# EAGLE board INA169_Breakout-Panel-v10 (EAGLE 6.5.0)
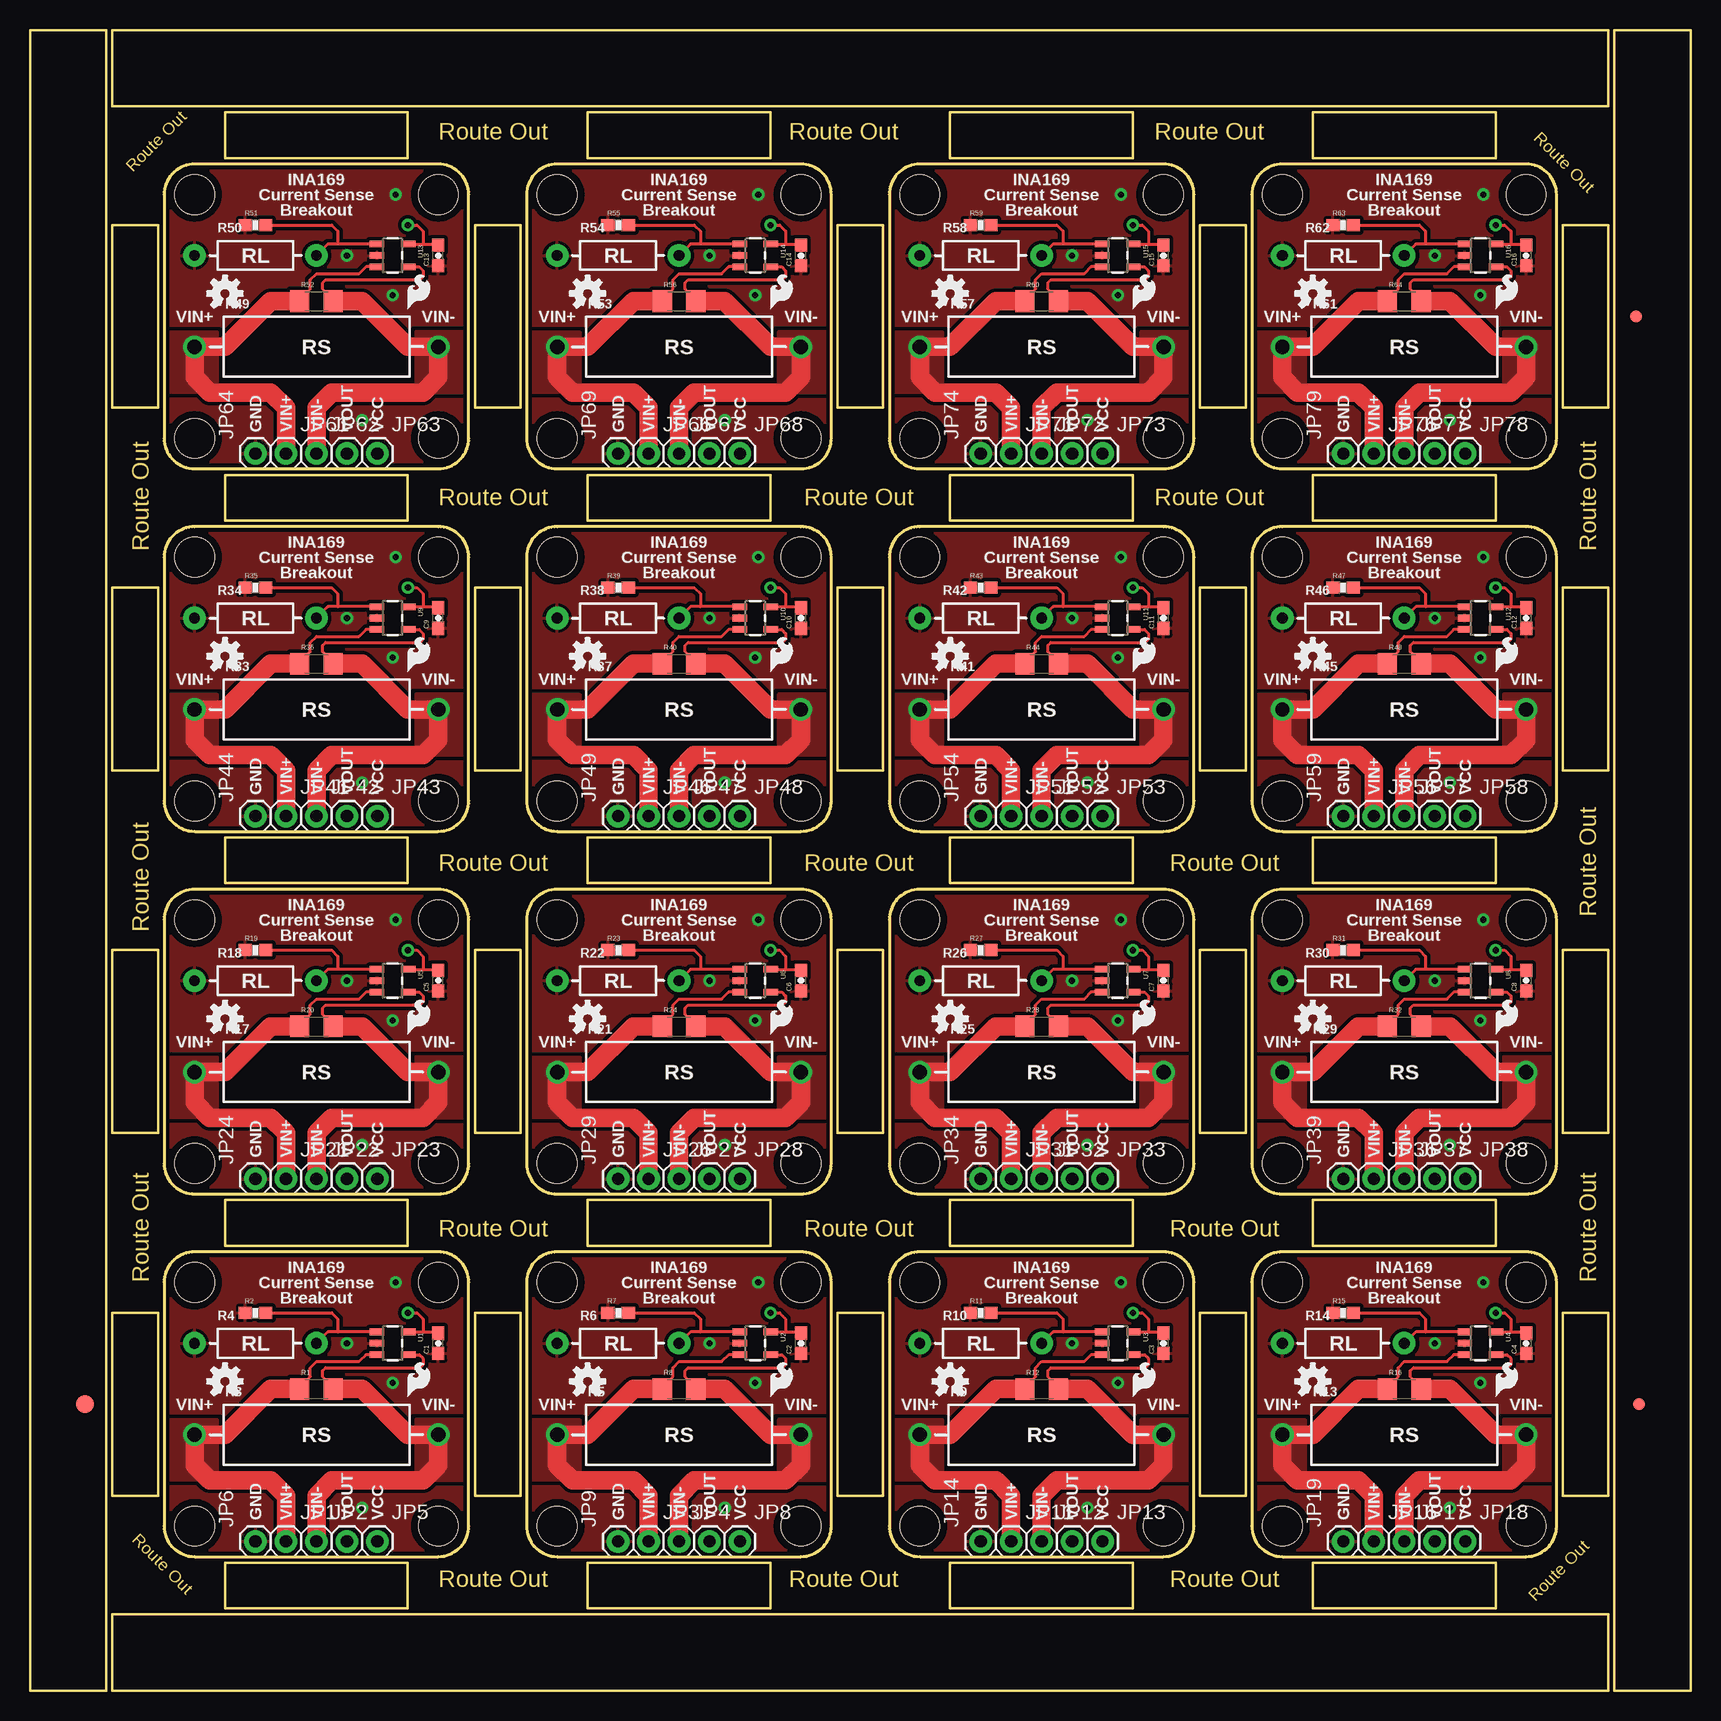
[diagram p0: board, top side]
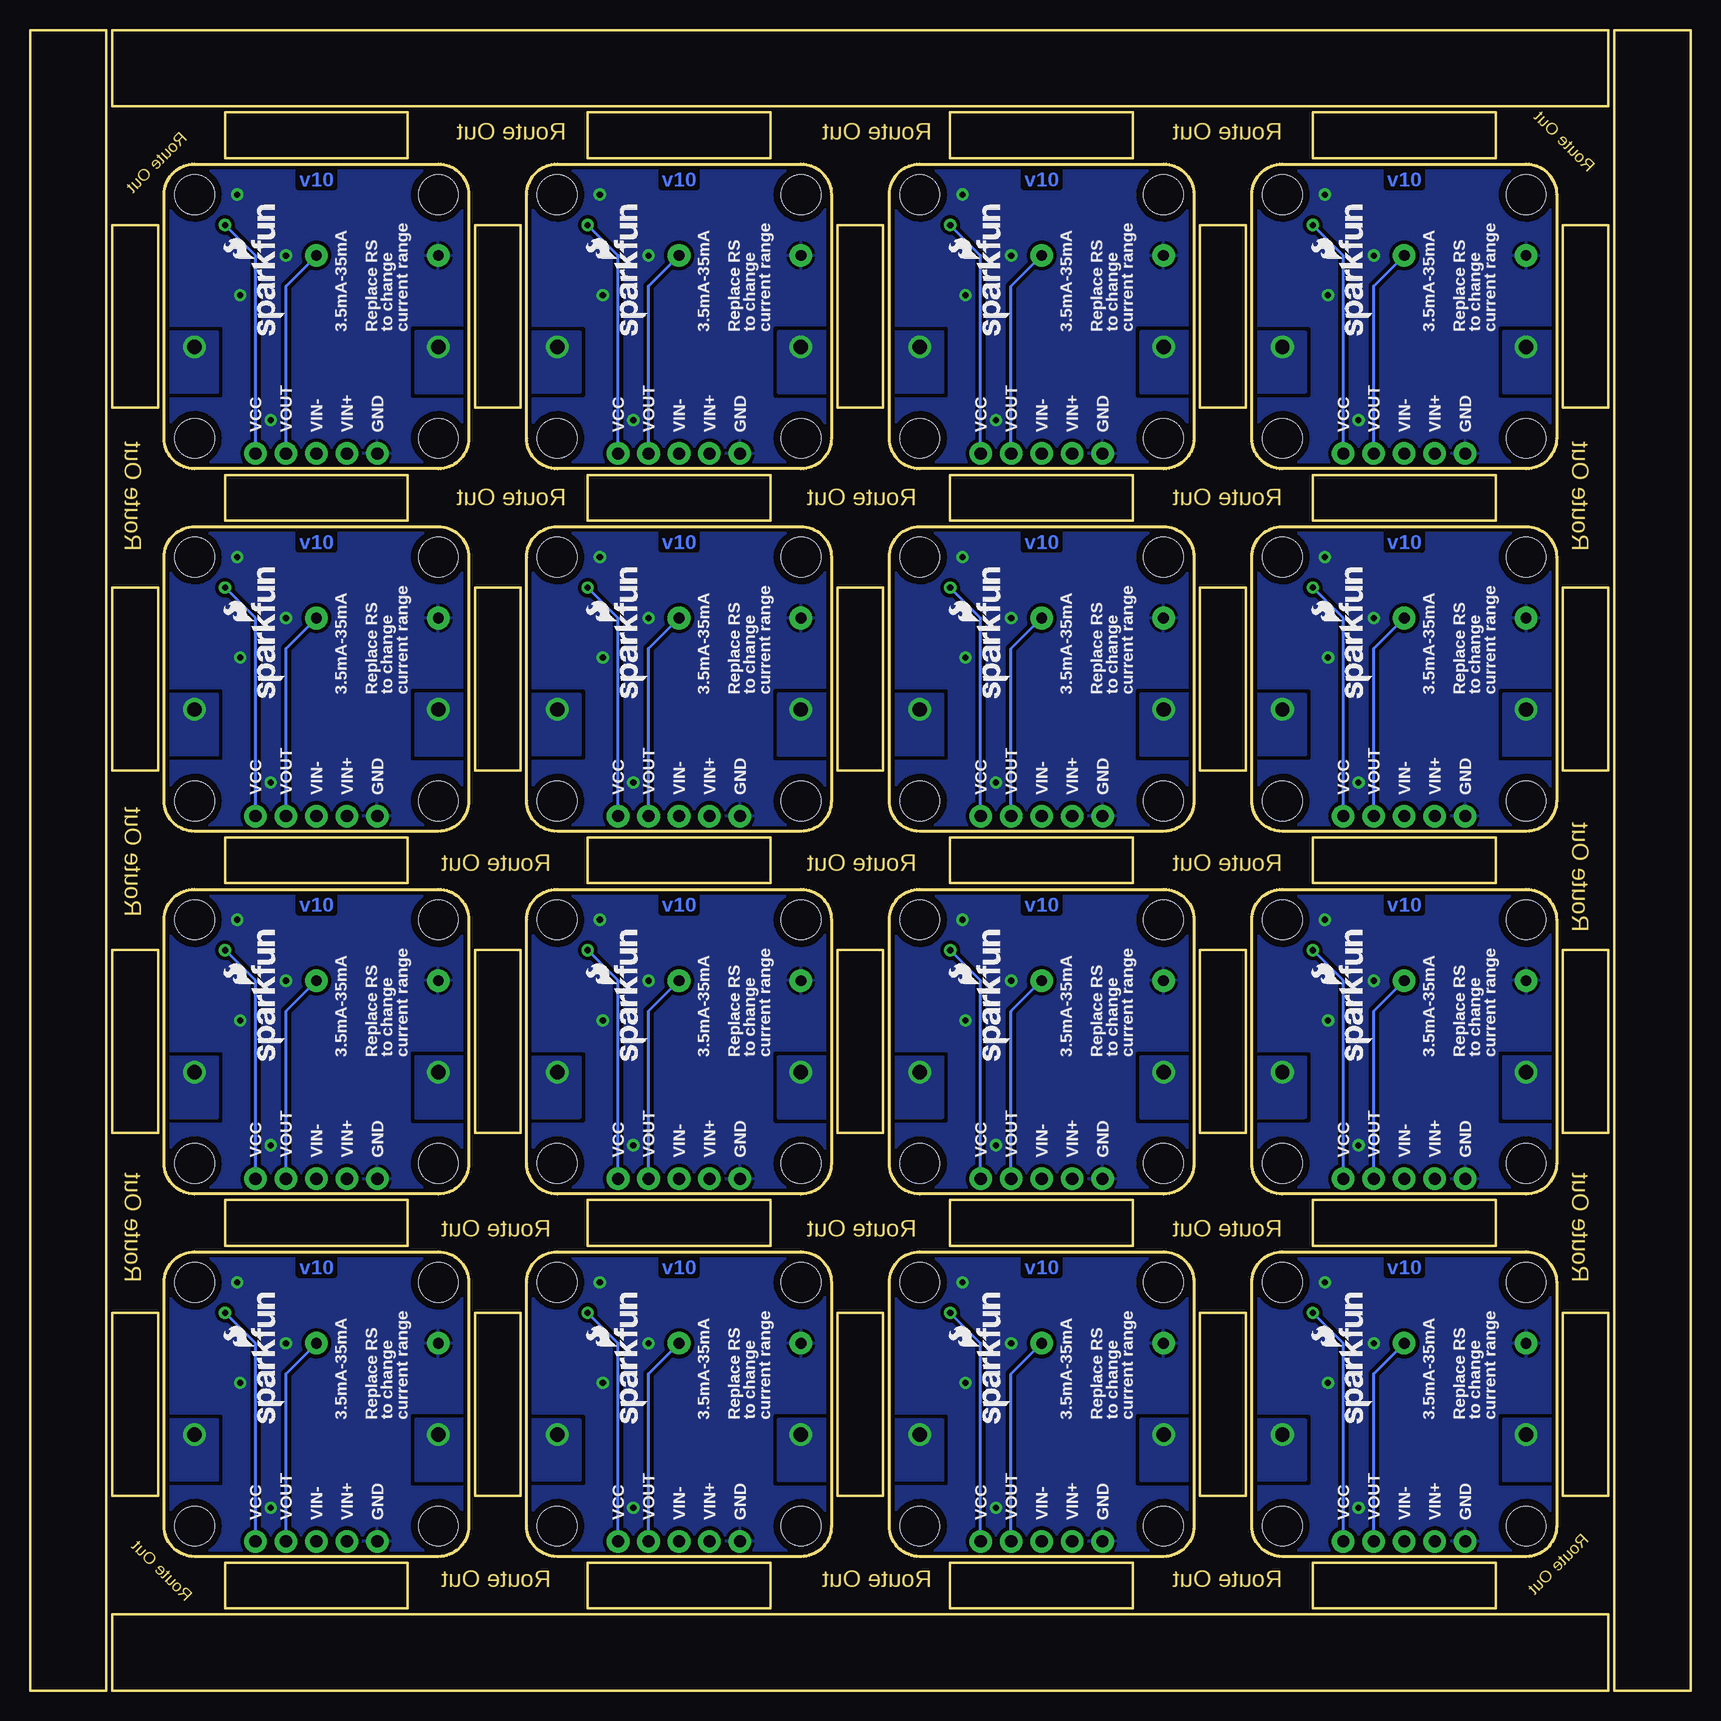
[diagram p1: board, bottom side, seen from below]

Size 138.43 x 138.43 mm. Coordinates in mm from the lower left corner, seen from the top.
Outline: 304 segments
Copper layers (1*16): Top 0.035mm / dielectric 1.5mm / Bottom 0.035mm
Design rules "default": minimum track width 7mil, minimum drill 15mil, track to track 8mil, track to pad 8mil, pad to pad 8mil, via to via 8mil, smd to smd 8mil, copper to edge 8mil, drill to drill 8mil, minimum pad ring 12mil, minimum via ring 10mil, stop-mask expansion 4mil, vias tented up to drill 20mil, thermal gap 10mil
tRestrict: area 29.7,27.7 to 30.7,30.2; area 30.5,28.4 to 33.3,29.5; area 59.9,27.7 to 61,30.2; area 60.7,28.4 to 63.5,29.5; area 90.2,27.7 to 91.2,30.2; area 90.9,28.4 to 93.7,29.5; area 120.4,27.7 to 121.4,30.2; area 121.2,28.4 to 124,29.5; area 29.7,57.9 to 30.7,60.5; area 30.5,58.7 to 33.3,59.7; area 59.9,57.9 to 61,60.5; area 60.7,58.7 to 63.5,59.7; 20 more areas

## Footprints (pad centres in the part's own frame; a part is rotated, then mirrored left to right if it is on the bottom)
0603-CAP = smd 1.1 x 1: 1 -0.85,0; 2 0.85,0
FIDUCIAL-1.5X3 = smd 1.5 x 1.5: 1 0,0
FIDUCIAL-1X2 = smd 1 x 1: 1 0,0
1X01 = drill 1.016 pad 1.88: 1 0,0
1206 = smd 1.6 x 1.8: 1 -1.4,0; 2 1.4,0
0603-RES = smd 1.1 x 1: 1 -0.85,0; 2 0.85,0
AXIAL-0.8 = drill 1.2 pad 1.88: P$1 -10.16,0; P$2 10.16,0
AXIAL-0.4 = drill 0.9 pad 1.88: P$1 -5.08,0; P$2 5.08,0
STAND-OFF = hole 3.302: 0,0
SOT23-5 = smd 0.55 x 1.2: 1 -0.95,-1.3; 2 0,-1.3; 3 0.95,-1.3; 4 0.95,1.3; 5 -0.95,1.3

## Placement (x,y rotation side)
C1  0.1uF  [0603-CAP]  34.04,28.96 90 top
C2  0.1uF  [0603-CAP]  64.26,28.96 90 top
C3  0.1uF  [0603-CAP]  94.49,28.96 90 top
C4  0.1uF  [0603-CAP]  124.71,28.96 90 top
C5  0.1uF  [0603-CAP]  34.04,59.18 90 top
C6  0.1uF  [0603-CAP]  64.26,59.18 90 top
C7  0.1uF  [0603-CAP]  94.49,59.18 90 top
C8  0.1uF  [0603-CAP]  124.71,59.18 90 top
C9  0.1uF  [0603-CAP]  34.04,89.41 90 top
C10  0.1uF  [0603-CAP]  64.26,89.41 90 top
C11  0.1uF  [0603-CAP]  94.49,89.41 90 top
C12  0.1uF  [0603-CAP]  124.71,89.41 90 top
C13  0.1uF  [0603-CAP]  34.04,119.63 90 top
C14  0.1uF  [0603-CAP]  64.26,119.63 90 top
C15  0.1uF  [0603-CAP]  94.49,119.63 90 top
C16  0.1uF  [0603-CAP]  124.71,119.63 90 top
E$1  [FIDUCIAL-1.5X3]  4.57,23.88 0 top
E$4  [FIDUCIAL-1X2]  133.86,114.55 180 top
E$5  [FIDUCIAL-1X2]  134.11,23.88 0 top
JP1  M01PTH  [1X01]  21.34,12.45 0 top
JP2  M01PTH  [1X01]  23.88,12.45 0 top
JP3  M01PTH  [1X01]  51.56,12.45 0 top
JP4  M01PTH  [1X01]  54.1,12.45 0 top
JP5  M01PTH  [1X01]  28.96,12.45 0 top
JP6  M01PTH  [1X01]  18.8,12.45 90 top
JP7  M01PTH  [1X01]  26.42,12.45 180 top
JP8  M01PTH  [1X01]  59.18,12.45 0 top
JP9  M01PTH  [1X01]  49.02,12.45 90 top
JP10  M01PTH  [1X01]  56.64,12.45 180 top
JP11  M01PTH  [1X01]  81.79,12.45 0 top
JP12  M01PTH  [1X01]  84.33,12.45 0 top
JP13  M01PTH  [1X01]  89.41,12.45 0 top
JP14  M01PTH  [1X01]  79.25,12.45 90 top
JP15  M01PTH  [1X01]  86.87,12.45 180 top
JP16  M01PTH  [1X01]  112.01,12.45 0 top
JP17  M01PTH  [1X01]  114.55,12.45 0 top
JP18  M01PTH  [1X01]  119.63,12.45 0 top
JP19  M01PTH  [1X01]  109.47,12.45 90 top
JP20  M01PTH  [1X01]  117.09,12.45 180 top
JP21  M01PTH  [1X01]  21.34,42.67 0 top
JP22  M01PTH  [1X01]  23.88,42.67 0 top
JP23  M01PTH  [1X01]  28.96,42.67 0 top
JP24  M01PTH  [1X01]  18.8,42.67 90 top
JP25  M01PTH  [1X01]  26.42,42.67 180 top
JP26  M01PTH  [1X01]  51.56,42.67 0 top
JP27  M01PTH  [1X01]  54.1,42.67 0 top
JP28  M01PTH  [1X01]  59.18,42.67 0 top
JP29  M01PTH  [1X01]  49.02,42.67 90 top
JP30  M01PTH  [1X01]  56.64,42.67 180 top
JP31  M01PTH  [1X01]  81.79,42.67 0 top
JP32  M01PTH  [1X01]  84.33,42.67 0 top
JP33  M01PTH  [1X01]  89.41,42.67 0 top
JP34  M01PTH  [1X01]  79.25,42.67 90 top
JP35  M01PTH  [1X01]  86.87,42.67 180 top
JP36  M01PTH  [1X01]  112.01,42.67 0 top
JP37  M01PTH  [1X01]  114.55,42.67 0 top
JP38  M01PTH  [1X01]  119.63,42.67 0 top
JP39  M01PTH  [1X01]  109.47,42.67 90 top
JP40  M01PTH  [1X01]  117.09,42.67 180 top
JP41  M01PTH  [1X01]  21.34,72.9 0 top
JP42  M01PTH  [1X01]  23.88,72.9 0 top
JP43  M01PTH  [1X01]  28.96,72.9 0 top
JP44  M01PTH  [1X01]  18.8,72.9 90 top
JP45  M01PTH  [1X01]  26.42,72.9 180 top
JP46  M01PTH  [1X01]  51.56,72.9 0 top
JP47  M01PTH  [1X01]  54.1,72.9 0 top
JP48  M01PTH  [1X01]  59.18,72.9 0 top
JP49  M01PTH  [1X01]  49.02,72.9 90 top
JP50  M01PTH  [1X01]  56.64,72.9 180 top
JP51  M01PTH  [1X01]  81.79,72.9 0 top
JP52  M01PTH  [1X01]  84.33,72.9 0 top
JP53  M01PTH  [1X01]  89.41,72.9 0 top
JP54  M01PTH  [1X01]  79.25,72.9 90 top
JP55  M01PTH  [1X01]  86.87,72.9 180 top
JP56  M01PTH  [1X01]  112.01,72.9 0 top
JP57  M01PTH  [1X01]  114.55,72.9 0 top
JP58  M01PTH  [1X01]  119.63,72.9 0 top
JP59  M01PTH  [1X01]  109.47,72.9 90 top
JP60  M01PTH  [1X01]  117.09,72.9 180 top
JP61  M01PTH  [1X01]  21.34,103.12 0 top
JP62  M01PTH  [1X01]  23.88,103.12 0 top
JP63  M01PTH  [1X01]  28.96,103.12 0 top
JP64  M01PTH  [1X01]  18.8,103.12 90 top
JP65  M01PTH  [1X01]  26.42,103.12 180 top
JP66  M01PTH  [1X01]  51.56,103.12 0 top
JP67  M01PTH  [1X01]  54.1,103.12 0 top
JP68  M01PTH  [1X01]  59.18,103.12 0 top
JP69  M01PTH  [1X01]  49.02,103.12 90 top
JP70  M01PTH  [1X01]  56.64,103.12 180 top
JP71  M01PTH  [1X01]  81.79,103.12 0 top
JP72  M01PTH  [1X01]  84.33,103.12 0 top
JP73  M01PTH  [1X01]  89.41,103.12 0 top
JP74  M01PTH  [1X01]  79.25,103.12 90 top
JP75  M01PTH  [1X01]  86.87,103.12 180 top
JP76  M01PTH  [1X01]  112.01,103.12 0 top
JP77  M01PTH  [1X01]  114.55,103.12 0 top
JP78  M01PTH  [1X01]  119.63,103.12 0 top
JP79  M01PTH  [1X01]  109.47,103.12 90 top
JP80  M01PTH  [1X01]  117.09,103.12 180 top
LOGO1  SFE_LOGO_NAME_FLAME.1_INCH  [SFE_LOGO_NAME_FLAME_.1]  26.42,21.84 90 bottom
LOGO2  OSHW-LOGOS  [OSHW-LOGO-S]  16.26,25.78 0 top
LOGO3  LOGO-SFESK  [SFE-LOGO-FLAME]  31.5,24.51 0 top
LOGO4  SFE_LOGO_NAME_FLAME.1_INCH  [SFE_LOGO_NAME_FLAME_.1]  56.64,21.84 90 bottom
LOGO5  OSHW-LOGOS  [OSHW-LOGO-S]  46.48,25.78 0 top
LOGO6  LOGO-SFESK  [SFE-LOGO-FLAME]  61.72,24.51 0 top
LOGO7  SFE_LOGO_NAME_FLAME.1_INCH  [SFE_LOGO_NAME_FLAME_.1]  86.87,21.84 90 bottom
LOGO8  OSHW-LOGOS  [OSHW-LOGO-S]  76.71,25.78 0 top
LOGO9  LOGO-SFESK  [SFE-LOGO-FLAME]  91.95,24.51 0 top
LOGO10  SFE_LOGO_NAME_FLAME.1_INCH  [SFE_LOGO_NAME_FLAME_.1]  117.09,21.84 90 bottom
LOGO11  OSHW-LOGOS  [OSHW-LOGO-S]  106.93,25.78 0 top
LOGO12  LOGO-SFESK  [SFE-LOGO-FLAME]  122.17,24.51 0 top
LOGO13  SFE_LOGO_NAME_FLAME.1_INCH  [SFE_LOGO_NAME_FLAME_.1]  26.42,52.07 90 bottom
LOGO14  OSHW-LOGOS  [OSHW-LOGO-S]  16.26,56.01 0 top
LOGO15  LOGO-SFESK  [SFE-LOGO-FLAME]  31.5,54.74 0 top
LOGO16  SFE_LOGO_NAME_FLAME.1_INCH  [SFE_LOGO_NAME_FLAME_.1]  56.64,52.07 90 bottom
LOGO17  OSHW-LOGOS  [OSHW-LOGO-S]  46.48,56.01 0 top
LOGO18  LOGO-SFESK  [SFE-LOGO-FLAME]  61.72,54.74 0 top
LOGO19  SFE_LOGO_NAME_FLAME.1_INCH  [SFE_LOGO_NAME_FLAME_.1]  86.87,52.07 90 bottom
LOGO20  OSHW-LOGOS  [OSHW-LOGO-S]  76.71,56.01 0 top
LOGO21  LOGO-SFESK  [SFE-LOGO-FLAME]  91.95,54.74 0 top
LOGO22  SFE_LOGO_NAME_FLAME.1_INCH  [SFE_LOGO_NAME_FLAME_.1]  117.09,52.07 90 bottom
LOGO23  OSHW-LOGOS  [OSHW-LOGO-S]  106.93,56.01 0 top
LOGO24  LOGO-SFESK  [SFE-LOGO-FLAME]  122.17,54.74 0 top
LOGO25  SFE_LOGO_NAME_FLAME.1_INCH  [SFE_LOGO_NAME_FLAME_.1]  26.42,82.3 90 bottom
LOGO26  OSHW-LOGOS  [OSHW-LOGO-S]  16.26,86.23 0 top
LOGO27  LOGO-SFESK  [SFE-LOGO-FLAME]  31.5,84.96 0 top
LOGO28  SFE_LOGO_NAME_FLAME.1_INCH  [SFE_LOGO_NAME_FLAME_.1]  56.64,82.3 90 bottom
LOGO29  OSHW-LOGOS  [OSHW-LOGO-S]  46.48,86.23 0 top
LOGO30  LOGO-SFESK  [SFE-LOGO-FLAME]  61.72,84.96 0 top
LOGO31  SFE_LOGO_NAME_FLAME.1_INCH  [SFE_LOGO_NAME_FLAME_.1]  86.87,82.3 90 bottom
LOGO32  OSHW-LOGOS  [OSHW-LOGO-S]  76.71,86.23 0 top
LOGO33  LOGO-SFESK  [SFE-LOGO-FLAME]  91.95,84.96 0 top
LOGO34  SFE_LOGO_NAME_FLAME.1_INCH  [SFE_LOGO_NAME_FLAME_.1]  117.09,82.3 90 bottom
LOGO35  OSHW-LOGOS  [OSHW-LOGO-S]  106.93,86.23 0 top
LOGO36  LOGO-SFESK  [SFE-LOGO-FLAME]  122.17,84.96 0 top
LOGO37  SFE_LOGO_NAME_FLAME.1_INCH  [SFE_LOGO_NAME_FLAME_.1]  26.42,112.52 90 bottom
LOGO38  OSHW-LOGOS  [OSHW-LOGO-S]  16.26,116.46 0 top
LOGO39  LOGO-SFESK  [SFE-LOGO-FLAME]  31.5,115.19 0 top
LOGO40  SFE_LOGO_NAME_FLAME.1_INCH  [SFE_LOGO_NAME_FLAME_.1]  56.64,112.52 90 bottom
LOGO41  OSHW-LOGOS  [OSHW-LOGO-S]  46.48,116.46 0 top
LOGO42  LOGO-SFESK  [SFE-LOGO-FLAME]  61.72,115.19 0 top
LOGO43  SFE_LOGO_NAME_FLAME.1_INCH  [SFE_LOGO_NAME_FLAME_.1]  86.87,112.52 90 bottom
LOGO44  OSHW-LOGOS  [OSHW-LOGO-S]  76.71,116.46 0 top
LOGO45  LOGO-SFESK  [SFE-LOGO-FLAME]  91.95,115.19 0 top
LOGO46  SFE_LOGO_NAME_FLAME.1_INCH  [SFE_LOGO_NAME_FLAME_.1]  117.09,112.52 90 bottom
LOGO47  OSHW-LOGOS  [OSHW-LOGO-S]  106.93,116.46 0 top
LOGO48  LOGO-SFESK  [SFE-LOGO-FLAME]  122.17,115.19 0 top
R1  10  [1206]  23.88,25.15 0 top
R2  10k  [0603-RES]  18.8,31.5 0 top
R3  [AXIAL-0.8]  23.88,21.34 0 top
R4  [AXIAL-0.4]  18.8,28.96 0 top
R5  [AXIAL-0.8]  54.1,21.34 0 top
R6  [AXIAL-0.4]  49.02,28.96 0 top
R7  10k  [0603-RES]  49.02,31.5 0 top
R8  10  [1206]  54.1,25.15 0 top
R9  [AXIAL-0.8]  84.33,21.34 0 top
R10  [AXIAL-0.4]  79.25,28.96 0 top
R11  10k  [0603-RES]  79.25,31.5 0 top
R12  10  [1206]  84.33,25.15 0 top
R13  [AXIAL-0.8]  114.55,21.34 0 top
R14  [AXIAL-0.4]  109.47,28.96 0 top
R15  10k  [0603-RES]  109.47,31.5 0 top
R16  10  [1206]  114.55,25.15 0 top
R17  [AXIAL-0.8]  23.88,51.56 0 top
R18  [AXIAL-0.4]  18.8,59.18 0 top
R19  10k  [0603-RES]  18.8,61.72 0 top
R20  10  [1206]  23.88,55.37 0 top
R21  [AXIAL-0.8]  54.1,51.56 0 top
R22  [AXIAL-0.4]  49.02,59.18 0 top
R23  10k  [0603-RES]  49.02,61.72 0 top
R24  10  [1206]  54.1,55.37 0 top
R25  [AXIAL-0.8]  84.33,51.56 0 top
R26  [AXIAL-0.4]  79.25,59.18 0 top
R27  10k  [0603-RES]  79.25,61.72 0 top
R28  10  [1206]  84.33,55.37 0 top
R29  [AXIAL-0.8]  114.55,51.56 0 top
R30  [AXIAL-0.4]  109.47,59.18 0 top
R31  10k  [0603-RES]  109.47,61.72 0 top
R32  10  [1206]  114.55,55.37 0 top
R33  [AXIAL-0.8]  23.88,81.79 0 top
R34  [AXIAL-0.4]  18.8,89.41 0 top
R35  10k  [0603-RES]  18.8,91.95 0 top
R36  10  [1206]  23.88,85.6 0 top
R37  [AXIAL-0.8]  54.1,81.79 0 top
R38  [AXIAL-0.4]  49.02,89.41 0 top
R39  10k  [0603-RES]  49.02,91.95 0 top
R40  10  [1206]  54.1,85.6 0 top
R41  [AXIAL-0.8]  84.33,81.79 0 top
R42  [AXIAL-0.4]  79.25,89.41 0 top
R43  10k  [0603-RES]  79.25,91.95 0 top
R44  10  [1206]  84.33,85.6 0 top
R45  [AXIAL-0.8]  114.55,81.79 0 top
R46  [AXIAL-0.4]  109.47,89.41 0 top
R47  10k  [0603-RES]  109.47,91.95 0 top
R48  10  [1206]  114.55,85.6 0 top
R49  [AXIAL-0.8]  23.88,112.01 0 top
R50  [AXIAL-0.4]  18.8,119.63 0 top
R51  10k  [0603-RES]  18.8,122.17 0 top
R52  10  [1206]  23.88,115.82 0 top
R53  [AXIAL-0.8]  54.1,112.01 0 top
R54  [AXIAL-0.4]  49.02,119.63 0 top
R55  10k  [0603-RES]  49.02,122.17 0 top
R56  10  [1206]  54.1,115.82 0 top
R57  [AXIAL-0.8]  84.33,112.01 0 top
R58  [AXIAL-0.4]  79.25,119.63 0 top
R59  10k  [0603-RES]  79.25,122.17 0 top
R60  10  [1206]  84.33,115.82 0 top
R61  [AXIAL-0.8]  114.55,112.01 0 top
R62  [AXIAL-0.4]  109.47,119.63 0 top
R63  10k  [0603-RES]  109.47,122.17 0 top
R64  10  [1206]  114.55,115.82 0 top
STANDOFF1  STAND-OFF  [STAND-OFF]  13.72,34.04 0 top
STANDOFF2  STAND-OFF  [STAND-OFF]  34.04,34.04 0 top
STANDOFF3  STAND-OFF  [STAND-OFF]  34.04,13.72 0 top
STANDOFF4  STAND-OFF  [STAND-OFF]  13.72,13.72 0 top
STANDOFF5  STAND-OFF  [STAND-OFF]  43.94,34.04 0 top
STANDOFF6  STAND-OFF  [STAND-OFF]  64.26,34.04 0 top
STANDOFF7  STAND-OFF  [STAND-OFF]  64.26,13.72 0 top
STANDOFF8  STAND-OFF  [STAND-OFF]  43.94,13.72 0 top
STANDOFF9  STAND-OFF  [STAND-OFF]  74.17,34.04 0 top
STANDOFF10  STAND-OFF  [STAND-OFF]  94.49,34.04 0 top
STANDOFF11  STAND-OFF  [STAND-OFF]  94.49,13.72 0 top
STANDOFF12  STAND-OFF  [STAND-OFF]  74.17,13.72 0 top
STANDOFF13  STAND-OFF  [STAND-OFF]  104.39,34.04 0 top
STANDOFF14  STAND-OFF  [STAND-OFF]  124.71,34.04 0 top
STANDOFF15  STAND-OFF  [STAND-OFF]  124.71,13.72 0 top
STANDOFF16  STAND-OFF  [STAND-OFF]  104.39,13.72 0 top
STANDOFF17  STAND-OFF  [STAND-OFF]  13.72,64.26 0 top
STANDOFF18  STAND-OFF  [STAND-OFF]  34.04,64.26 0 top
STANDOFF19  STAND-OFF  [STAND-OFF]  34.04,43.94 0 top
STANDOFF20  STAND-OFF  [STAND-OFF]  13.72,43.94 0 top
STANDOFF21  STAND-OFF  [STAND-OFF]  43.94,64.26 0 top
STANDOFF22  STAND-OFF  [STAND-OFF]  64.26,64.26 0 top
STANDOFF23  STAND-OFF  [STAND-OFF]  64.26,43.94 0 top
STANDOFF24  STAND-OFF  [STAND-OFF]  43.94,43.94 0 top
STANDOFF25  STAND-OFF  [STAND-OFF]  74.17,64.26 0 top
STANDOFF26  STAND-OFF  [STAND-OFF]  94.49,64.26 0 top
STANDOFF27  STAND-OFF  [STAND-OFF]  94.49,43.94 0 top
STANDOFF28  STAND-OFF  [STAND-OFF]  74.17,43.94 0 top
STANDOFF29  STAND-OFF  [STAND-OFF]  104.39,64.26 0 top
STANDOFF30  STAND-OFF  [STAND-OFF]  124.71,64.26 0 top
STANDOFF31  STAND-OFF  [STAND-OFF]  124.71,43.94 0 top
STANDOFF32  STAND-OFF  [STAND-OFF]  104.39,43.94 0 top
STANDOFF33  STAND-OFF  [STAND-OFF]  13.72,94.49 0 top
STANDOFF34  STAND-OFF  [STAND-OFF]  34.04,94.49 0 top
STANDOFF35  STAND-OFF  [STAND-OFF]  34.04,74.17 0 top
STANDOFF36  STAND-OFF  [STAND-OFF]  13.72,74.17 0 top
STANDOFF37  STAND-OFF  [STAND-OFF]  43.94,94.49 0 top
STANDOFF38  STAND-OFF  [STAND-OFF]  64.26,94.49 0 top
STANDOFF39  STAND-OFF  [STAND-OFF]  64.26,74.17 0 top
STANDOFF40  STAND-OFF  [STAND-OFF]  43.94,74.17 0 top
STANDOFF41  STAND-OFF  [STAND-OFF]  74.17,94.49 0 top
STANDOFF42  STAND-OFF  [STAND-OFF]  94.49,94.49 0 top
STANDOFF43  STAND-OFF  [STAND-OFF]  94.49,74.17 0 top
STANDOFF44  STAND-OFF  [STAND-OFF]  74.17,74.17 0 top
STANDOFF45  STAND-OFF  [STAND-OFF]  104.39,94.49 0 top
STANDOFF46  STAND-OFF  [STAND-OFF]  124.71,94.49 0 top
STANDOFF47  STAND-OFF  [STAND-OFF]  124.71,74.17 0 top
STANDOFF48  STAND-OFF  [STAND-OFF]  104.39,74.17 0 top
STANDOFF49  STAND-OFF  [STAND-OFF]  13.72,124.71 0 top
STANDOFF50  STAND-OFF  [STAND-OFF]  34.04,124.71 0 top
STANDOFF51  STAND-OFF  [STAND-OFF]  34.04,104.39 0 top
STANDOFF52  STAND-OFF  [STAND-OFF]  13.72,104.39 0 top
STANDOFF53  STAND-OFF  [STAND-OFF]  43.94,124.71 0 top
STANDOFF54  STAND-OFF  [STAND-OFF]  64.26,124.71 0 top
STANDOFF55  STAND-OFF  [STAND-OFF]  64.26,104.39 0 top
STANDOFF56  STAND-OFF  [STAND-OFF]  43.94,104.39 0 top
STANDOFF57  STAND-OFF  [STAND-OFF]  74.17,124.71 0 top
STANDOFF58  STAND-OFF  [STAND-OFF]  94.49,124.71 0 top
STANDOFF59  STAND-OFF  [STAND-OFF]  94.49,104.39 0 top
STANDOFF60  STAND-OFF  [STAND-OFF]  74.17,104.39 0 top
STANDOFF61  STAND-OFF  [STAND-OFF]  104.39,124.71 0 top
STANDOFF62  STAND-OFF  [STAND-OFF]  124.71,124.71 0 top
STANDOFF63  STAND-OFF  [STAND-OFF]  124.71,104.39 0 top
STANDOFF64  STAND-OFF  [STAND-OFF]  104.39,104.39 0 top
U1  INA169  [SOT23-5]  30.23,28.96 270 top
U2  INA169  [SOT23-5]  60.45,28.96 270 top
U3  INA169  [SOT23-5]  90.68,28.96 270 top
U4  INA169  [SOT23-5]  120.9,28.96 270 top
U5  INA169  [SOT23-5]  30.23,59.18 270 top
U6  INA169  [SOT23-5]  60.45,59.18 270 top
U7  INA169  [SOT23-5]  90.68,59.18 270 top
U8  INA169  [SOT23-5]  120.9,59.18 270 top
U9  INA169  [SOT23-5]  30.23,89.41 270 top
U10  INA169  [SOT23-5]  60.45,89.41 270 top
U11  INA169  [SOT23-5]  90.68,89.41 270 top
U12  INA169  [SOT23-5]  120.9,89.41 270 top
U13  INA169  [SOT23-5]  30.23,119.63 270 top
U14  INA169  [SOT23-5]  60.45,119.63 270 top
U15  INA169  [SOT23-5]  90.68,119.63 270 top
U16  INA169  [SOT23-5]  120.9,119.63 270 top

## Library data of the parts
C1-C16 = SparkFun-Passives
E$1 E$4 E$5 LOGO1-LOGO48 = SparkFun-Aesthetics
JP1-JP80 = SparkFun-Connectors
R1 R8 R12 R16 R20 R24 R28 R32 R36 R40 R44 R48 R52 R56 R60 R64 = SparkFun-Resistors; SIZE: 1206; TOL: 1%
R2 R7 R11 R15 R19 R23 R27 R31 R35 R39 R43 R47 R51 R55 R59 R63 = SparkFun-Resistors; TOL: 1%
R3-R6 R9 R10 R13 R14 R17 R18 R21 R22 R25 R26 R29 R30 R33 R34 R37 R38 R41 R42 R45 R46 R49 R50 R53 R54 R57 R58 R61 R62 = SparkFun-Resistors; PLACE: DNP
STANDOFF1-STANDOFF64 = SparkFun-Electromechanical
U1-U16 = SparkFun-AnalogIC

## Nets
GND: C1.1 JP6.1 R2.1 R4.P$1 U1.2
GND1: C2.1 JP9.1 R6.P$1 R7.1 U2.2
GND2: C3.1 JP14.1 R10.P$1 R11.1 U3.2
GND3: C4.1 JP19.1 R14.P$1 R15.1 U4.2
GND4: C5.1 JP24.1 R18.P$1 R19.1 U5.2
GND5: C6.1 JP29.1 R22.P$1 R23.1 U6.2
GND6: C7.1 JP34.1 R26.P$1 R27.1 U7.2
GND7: C8.1 JP39.1 R30.P$1 R31.1 U8.2
GND8: C9.1 JP44.1 R34.P$1 R35.1 U9.2
GND9: C10.1 JP49.1 R38.P$1 R39.1 U10.2
GND10: C11.1 JP54.1 R42.P$1 R43.1 U11.2
GND11: C12.1 JP59.1 R46.P$1 R47.1 U12.2
GND12: C13.1 JP64.1 R50.P$1 R51.1 U13.2
GND13: C14.1 JP69.1 R54.P$1 R55.1 U14.2
GND14: C15.1 JP74.1 R58.P$1 R59.1 U15.2
GND15: C16.1 JP79.1 R62.P$1 R63.1 U16.2
VCC: C1.2 JP5.1 U1.5
VCC1: C2.2 JP8.1 U2.5
VCC2: C3.2 JP13.1 U3.5
VCC3: C4.2 JP18.1 U4.5
VCC4: C5.2 JP23.1 U5.5
VCC5: C6.2 JP28.1 U6.5
VCC6: C7.2 JP33.1 U7.5
VCC7: C8.2 JP38.1 U8.5
VCC8: C9.2 JP43.1 U9.5
VCC9: C10.2 JP48.1 U10.5
VCC10: C11.2 JP53.1 U11.5
VCC11: C12.2 JP58.1 U12.5
VCC12: C13.2 JP63.1 U13.5
VCC13: C14.2 JP68.1 U14.5
VCC14: C15.2 JP73.1 U15.5
VCC15: C16.2 JP78.1 U16.5
VIN+: JP1.1 R1.1 R3.P$1 U1.3
VIN+1: JP3.1 R5.P$1 R8.1 U2.3
VIN+2: JP11.1 R9.P$1 R12.1 U3.3
VIN+3: JP16.1 R13.P$1 R16.1 U4.3
VIN+4: JP21.1 R17.P$1 R20.1 U5.3
VIN+5: JP26.1 R21.P$1 R24.1 U6.3
VIN+6: JP31.1 R25.P$1 R28.1 U7.3
VIN+7: JP36.1 R29.P$1 R32.1 U8.3
VIN+8: JP41.1 R33.P$1 R36.1 U9.3
VIN+9: JP46.1 R37.P$1 R40.1 U10.3
VIN+10: JP51.1 R41.P$1 R44.1 U11.3
VIN+11: JP56.1 R45.P$1 R48.1 U12.3
VIN+12: JP61.1 R49.P$1 R52.1 U13.3
VIN+13: JP66.1 R53.P$1 R56.1 U14.3
VIN+14: JP71.1 R57.P$1 R60.1 U15.3
VIN+15: JP76.1 R61.P$1 R64.1 U16.3
VIN-: JP2.1 R1.2 R3.P$2 U1.4
VIN-1: JP4.1 R5.P$2 R8.2 U2.4
VIN-2: JP12.1 R9.P$2 R12.2 U3.4
VIN-3: JP17.1 R13.P$2 R16.2 U4.4
VIN-4: JP22.1 R17.P$2 R20.2 U5.4
VIN-5: JP27.1 R21.P$2 R24.2 U6.4
VIN-6: JP32.1 R25.P$2 R28.2 U7.4
VIN-7: JP37.1 R29.P$2 R32.2 U8.4
VIN-8: JP42.1 R33.P$2 R36.2 U9.4
VIN-9: JP47.1 R37.P$2 R40.2 U10.4
VIN-10: JP52.1 R41.P$2 R44.2 U11.4
VIN-11: JP57.1 R45.P$2 R48.2 U12.4
VIN-12: JP62.1 R49.P$2 R52.2 U13.4
VIN-13: JP67.1 R53.P$2 R56.2 U14.4
VIN-14: JP72.1 R57.P$2 R60.2 U15.4
VIN-15: JP77.1 R61.P$2 R64.2 U16.4
VOUT: JP7.1 R2.2 R4.P$2 U1.1
VOUT1: JP10.1 R6.P$2 R7.2 U2.1
VOUT2: JP15.1 R10.P$2 R11.2 U3.1
VOUT3: JP20.1 R14.P$2 R15.2 U4.1
VOUT4: JP25.1 R18.P$2 R19.2 U5.1
VOUT5: JP30.1 R22.P$2 R23.2 U6.1
VOUT6: JP35.1 R26.P$2 R27.2 U7.1
VOUT7: JP40.1 R30.P$2 R31.2 U8.1
VOUT8: JP45.1 R34.P$2 R35.2 U9.1
VOUT9: JP50.1 R38.P$2 R39.2 U10.1
VOUT10: JP55.1 R42.P$2 R43.2 U11.1
VOUT11: JP60.1 R46.P$2 R47.2 U12.1
VOUT12: JP65.1 R50.P$2 R51.2 U13.1
VOUT13: JP70.1 R54.P$2 R55.2 U14.1
VOUT14: JP75.1 R58.P$2 R59.2 U15.1
VOUT15: JP80.1 R62.P$2 R63.2 U16.1

## Tracks (layer width: path | path; a pad name or v marks a point on that pad's centre or on a via)
GND  (via drill 0.51)
  other vias: 26.42,28.96 30.48,34.04 27.69,15.24 30.23,25.65
  pour Top (isolate 0.305, rank 6): 11.18,36.58 11.18,11.18 36.58,11.18 36.58,36.58
  pour Bottom (isolate 0.305, rank 6): 11.18,36.58 11.18,11.18 36.58,11.18 36.58,36.58
GND1  (via drill 0.51)
  other vias: 56.64,28.96 60.71,34.04 57.91,15.24 60.45,25.65
  pour Top (isolate 0.305, rank 6): 41.4,36.58 41.4,11.18 66.8,11.18 66.8,36.58
  pour Bottom (isolate 0.305, rank 6): 41.4,36.58 41.4,11.18 66.8,11.18 66.8,36.58
GND2  (via drill 0.51)
  other vias: 86.87,28.96 90.93,34.04 88.14,15.24 90.68,25.65
  pour Top (isolate 0.305, rank 6): 71.63,36.58 71.63,11.18 97.03,11.18 97.03,36.58
  pour Bottom (isolate 0.305, rank 6): 71.63,36.58 71.63,11.18 97.03,11.18 97.03,36.58
GND3  (via drill 0.51)
  other vias: 117.09,28.96 121.16,34.04 118.36,15.24 120.9,25.65
  pour Top (isolate 0.305, rank 6): 101.85,36.58 101.85,11.18 127.25,11.18 127.25,36.58
  pour Bottom (isolate 0.305, rank 6): 101.85,36.58 101.85,11.18 127.25,11.18 127.25,36.58
GND4  (via drill 0.51)
  other vias: 26.42,59.18 30.48,64.26 27.69,45.47 30.23,55.88
  pour Top (isolate 0.305, rank 6): 11.18,66.8 11.18,41.4 36.58,41.4 36.58,66.8
  pour Bottom (isolate 0.305, rank 6): 11.18,66.8 11.18,41.4 36.58,41.4 36.58,66.8
GND5  (via drill 0.51)
  other vias: 56.64,59.18 60.71,64.26 57.91,45.47 60.45,55.88
  pour Top (isolate 0.305, rank 6): 41.4,66.8 41.4,41.4 66.8,41.4 66.8,66.8
  pour Bottom (isolate 0.305, rank 6): 41.4,66.8 41.4,41.4 66.8,41.4 66.8,66.8
GND6  (via drill 0.51)
  other vias: 86.87,59.18 90.93,64.26 88.14,45.47 90.68,55.88
  pour Top (isolate 0.305, rank 6): 71.63,66.8 71.63,41.4 97.03,41.4 97.03,66.8
  pour Bottom (isolate 0.305, rank 6): 71.63,66.8 71.63,41.4 97.03,41.4 97.03,66.8
GND7  (via drill 0.51)
  other vias: 117.09,59.18 121.16,64.26 118.36,45.47 120.9,55.88
  pour Top (isolate 0.305, rank 6): 101.85,66.8 101.85,41.4 127.25,41.4 127.25,66.8
  pour Bottom (isolate 0.305, rank 6): 101.85,66.8 101.85,41.4 127.25,41.4 127.25,66.8
GND8  (via drill 0.51)
  other vias: 26.42,89.41 30.48,94.49 27.69,75.69 30.23,86.11
  pour Top (isolate 0.305, rank 6): 11.18,97.03 11.18,71.63 36.58,71.63 36.58,97.03
  pour Bottom (isolate 0.305, rank 6): 11.18,97.03 11.18,71.63 36.58,71.63 36.58,97.03
GND9  (via drill 0.51)
  other vias: 56.64,89.41 60.71,94.49 57.91,75.69 60.45,86.11
  pour Top (isolate 0.305, rank 6): 41.4,97.03 41.4,71.63 66.8,71.63 66.8,97.03
  pour Bottom (isolate 0.305, rank 6): 41.4,97.03 41.4,71.63 66.8,71.63 66.8,97.03
GND10  (via drill 0.51)
  other vias: 86.87,89.41 90.93,94.49 88.14,75.69 90.68,86.11
  pour Top (isolate 0.305, rank 6): 71.63,97.03 71.63,71.63 97.03,71.63 97.03,97.03
  pour Bottom (isolate 0.305, rank 6): 71.63,97.03 71.63,71.63 97.03,71.63 97.03,97.03
GND11  (via drill 0.51)
  other vias: 117.09,89.41 121.16,94.49 118.36,75.69 120.9,86.11
  pour Top (isolate 0.305, rank 6): 101.85,97.03 101.85,71.63 127.25,71.63 127.25,97.03
  pour Bottom (isolate 0.305, rank 6): 101.85,97.03 101.85,71.63 127.25,71.63 127.25,97.03
GND12  (via drill 0.51)
  other vias: 26.42,119.63 30.48,124.71 27.69,105.92 30.23,116.33
  pour Top (isolate 0.305, rank 6): 11.18,127.25 11.18,101.85 36.58,101.85 36.58,127.25
  pour Bottom (isolate 0.305, rank 6): 11.18,127.25 11.18,101.85 36.58,101.85 36.58,127.25
GND13  (via drill 0.51)
  other vias: 56.64,119.63 60.71,124.71 57.91,105.92 60.45,116.33
  pour Top (isolate 0.305, rank 6): 41.4,127.25 41.4,101.85 66.8,101.85 66.8,127.25
  pour Bottom (isolate 0.305, rank 6): 41.4,127.25 41.4,101.85 66.8,101.85 66.8,127.25
GND14  (via drill 0.51)
  other vias: 86.87,119.63 90.93,124.71 88.14,105.92 90.68,116.33
  pour Top (isolate 0.305, rank 6): 71.63,127.25 71.63,101.85 97.03,101.85 97.03,127.25
  pour Bottom (isolate 0.305, rank 6): 71.63,127.25 71.63,101.85 97.03,101.85 97.03,127.25
GND15  (via drill 0.51)
  other vias: 117.09,119.63 121.16,124.71 118.36,105.92 120.9,116.33
  pour Top (isolate 0.305, rank 6): 101.85,127.25 101.85,101.85 127.25,101.85 127.25,127.25
  pour Bottom (isolate 0.305, rank 6): 101.85,127.25 101.85,101.85 127.25,101.85 127.25,127.25
VCC  (via drill 0.51)
  Top 0.254: U1.5 32.77,29.91 | 32.77,29.91 33.94,29.91 C1.2 | v31.5,31.5 32.26,31.5 32.77,30.99 32.77,29.91
  Bottom 0.254: JP5.1 28.96,28.96 v31.5,31.5
VCC1  (via drill 0.51)
  Top 0.254: U2.5 62.99,29.91 | 62.99,29.91 64.16,29.91 C2.2 | v61.72,31.5 62.48,31.5 62.99,30.99 62.99,29.91
  Bottom 0.254: JP8.1 59.18,28.96 v61.72,31.5
VCC2  (via drill 0.51)
  Top 0.254: U3.5 93.22,29.91 | 93.22,29.91 94.39,29.91 C3.2 | v91.95,31.5 92.71,31.5 93.22,30.99 93.22,29.91
  Bottom 0.254: JP13.1 89.41,28.96 v91.95,31.5
VCC3  (via drill 0.51)
  Top 0.254: U4.5 123.44,29.91 | 123.44,29.91 124.61,29.91 C4.2 | v122.17,31.5 122.94,31.5 123.44,30.99 123.44,29.91
  Bottom 0.254: JP18.1 119.63,28.96 v122.17,31.5
VCC4  (via drill 0.51)
  Top 0.254: U5.5 32.77,60.13 | 32.77,60.13 33.94,60.13 C5.2 | v31.5,61.72 32.26,61.72 32.77,61.21 32.77,60.13
  Bottom 0.254: JP23.1 28.96,59.18 v31.5,61.72
VCC5  (via drill 0.51)
  Top 0.254: U6.5 62.99,60.13 | 62.99,60.13 64.16,60.13 C6.2 | v61.72,61.72 62.48,61.72 62.99,61.21 62.99,60.13
  Bottom 0.254: JP28.1 59.18,59.18 v61.72,61.72
VCC6  (via drill 0.51)
  Top 0.254: U7.5 93.22,60.13 | 93.22,60.13 94.39,60.13 C7.2 | v91.95,61.72 92.71,61.72 93.22,61.21 93.22,60.13
  Bottom 0.254: JP33.1 89.41,59.18 v91.95,61.72
VCC7  (via drill 0.51)
  Top 0.254: U8.5 123.44,60.13 | 123.44,60.13 124.61,60.13 C8.2 | v122.17,61.72 122.94,61.72 123.44,61.21 123.44,60.13
  Bottom 0.254: JP38.1 119.63,59.18 v122.17,61.72
VCC8  (via drill 0.51)
  Top 0.254: U9.5 32.77,90.36 | 32.77,90.36 33.94,90.36 C9.2 | v31.5,91.95 32.26,91.95 32.77,91.44 32.77,90.36
  Bottom 0.254: JP43.1 28.96,89.41 v31.5,91.95
VCC9  (via drill 0.51)
  Top 0.254: U10.5 62.99,90.36 | 62.99,90.36 64.16,90.36 C10.2 | v61.72,91.95 62.48,91.95 62.99,91.44 62.99,90.36
  Bottom 0.254: JP48.1 59.18,89.41 v61.72,91.95
VCC10  (via drill 0.51)
  Top 0.254: U11.5 93.22,90.36 | 93.22,90.36 94.39,90.36 C11.2 | v91.95,91.95 92.71,91.95 93.22,91.44 93.22,90.36
  Bottom 0.254: JP53.1 89.41,89.41 v91.95,91.95
VCC11  (via drill 0.51)
  Top 0.254: U12.5 123.44,90.36 | 123.44,90.36 124.61,90.36 C12.2 | v122.17,91.95 122.94,91.95 123.44,91.44 123.44,90.36
  Bottom 0.254: JP58.1 119.63,89.41 v122.17,91.95
VCC12  (via drill 0.51)
  Top 0.254: U13.5 32.77,120.58 | 32.77,120.58 33.94,120.58 C13.2 | v31.5,122.17 32.26,122.17 32.77,121.67 32.77,120.58
  Bottom 0.254: JP63.1 28.96,119.63 v31.5,122.17
VCC13  (via drill 0.51)
  Top 0.254: U14.5 62.99,120.58 | 62.99,120.58 64.16,120.58 C14.2 | v61.72,122.17 62.48,122.17 62.99,121.67 62.99,120.58
  Bottom 0.254: JP68.1 59.18,119.63 v61.72,122.17
VCC14  (via drill 0.51)
  Top 0.254: U15.5 93.22,120.58 | 93.22,120.58 94.39,120.58 C15.2 | v91.95,122.17 92.71,122.17 93.22,121.67 93.22,120.58
  Bottom 0.254: JP73.1 89.41,119.63 v91.95,122.17
VCC15  (via drill 0.51)
  Top 0.254: U16.5 123.44,120.58 | 123.44,120.58 124.61,120.58 C16.2 | v122.17,122.17 122.94,122.17 123.44,121.67 123.44,120.58
  Bottom 0.254: JP78.1 119.63,119.63 v122.17,122.17
VIN+
  Top 0.254: U1.3 28.01,28.01 27.43,27.43 23.88,27.43 23.37,26.92 23.37,26.16 22.48,25.27 R1.1 22.1,25.15
  Top 1.524: JP1.1 21.34,16.26 20.07,17.53 14.99,17.53 13.72,18.8 R3.P$1 16.26,21.34 20.07,25.15 22.1,25.15
  pour Top (isolate 0.305, no thermals): 11.18,22.61 15.62,22.61 15.62,17.53 11.18,17.53
  pour Bottom (isolate 0.305, no thermals): 11.18,22.61 15.62,22.61 15.62,17.53 11.18,17.53
VIN+1
  Top 0.254: U2.3 58.23,28.01 57.66,27.43 54.1,27.43 53.59,26.92 53.59,26.16 52.7,25.27 R8.1 52.32,25.15
  Top 1.524: JP3.1 51.56,16.26 50.29,17.53 45.21,17.53 43.94,18.8 R5.P$1 46.48,21.34 50.29,25.15 52.32,25.15
  pour Top (isolate 0.305, no thermals): 41.4,22.61 45.85,22.61 45.85,17.53 41.4,17.53
  pour Bottom (isolate 0.305, no thermals): 41.4,22.61 45.85,22.61 45.85,17.53 41.4,17.53
VIN+2
  Top 0.254: U3.3 88.46,28.01 87.88,27.43 84.33,27.43 83.82,26.92 83.82,26.16 82.93,25.27 R12.1 82.55,25.15
  Top 1.524: JP11.1 81.79,16.26 80.52,17.53 75.44,17.53 74.17,18.8 R9.P$1 76.71,21.34 80.52,25.15 82.55,25.15
  pour Top (isolate 0.305, no thermals): 71.63,22.61 76.07,22.61 76.07,17.53 71.63,17.53
  pour Bottom (isolate 0.305, no thermals): 71.63,22.61 76.07,22.61 76.07,17.53 71.63,17.53
VIN+3
  Top 0.254: U4.3 118.68,28.01 118.11,27.43 114.55,27.43 114.05,26.92 114.05,26.16 113.15,25.27 R16.1 112.78,25.15
  Top 1.524: JP16.1 112.01,16.26 110.74,17.53 105.66,17.53 104.39,18.8 R13.P$1 106.93,21.34 110.74,25.15 112.78,25.15
  pour Top (isolate 0.305, no thermals): 101.85,22.61 106.3,22.61 106.3,17.53 101.85,17.53
  pour Bottom (isolate 0.305, no thermals): 101.85,22.61 106.3,22.61 106.3,17.53 101.85,17.53
VIN+4
  Top 0.254: U5.3 28.01,58.23 27.43,57.66 23.88,57.66 23.37,57.15 23.37,56.39 22.48,55.5 R20.1 22.1,55.37
  Top 1.524: JP21.1 21.34,46.48 20.07,47.75 14.99,47.75 13.72,49.02 R17.P$1 16.26,51.56 20.07,55.37 22.1,55.37
  pour Top (isolate 0.305, no thermals): 11.18,52.83 15.62,52.83 15.62,47.75 11.18,47.75
  pour Bottom (isolate 0.305, no thermals): 11.18,52.83 15.62,52.83 15.62,47.75 11.18,47.75
VIN+5
  Top 0.254: U6.3 58.23,58.23 57.66,57.66 54.1,57.66 53.59,57.15 53.59,56.39 52.7,55.5 R24.1 52.32,55.37
  Top 1.524: JP26.1 51.56,46.48 50.29,47.75 45.21,47.75 43.94,49.02 R21.P$1 46.48,51.56 50.29,55.37 52.32,55.37
  pour Top (isolate 0.305, no thermals): 41.4,52.83 45.85,52.83 45.85,47.75 41.4,47.75
  pour Bottom (isolate 0.305, no thermals): 41.4,52.83 45.85,52.83 45.85,47.75 41.4,47.75
VIN+6
  Top 0.254: U7.3 88.46,58.23 87.88,57.66 84.33,57.66 83.82,57.15 83.82,56.39 82.93,55.5 R28.1 82.55,55.37
  Top 1.524: JP31.1 81.79,46.48 80.52,47.75 75.44,47.75 74.17,49.02 R25.P$1 76.71,51.56 80.52,55.37 82.55,55.37
  pour Top (isolate 0.305, no thermals): 71.63,52.83 76.07,52.83 76.07,47.75 71.63,47.75
  pour Bottom (isolate 0.305, no thermals): 71.63,52.83 76.07,52.83 76.07,47.75 71.63,47.75
VIN+7
  Top 0.254: U8.3 118.68,58.23 118.11,57.66 114.55,57.66 114.05,57.15 114.05,56.39 113.15,55.5 R32.1 112.78,55.37
  Top 1.524: JP36.1 112.01,46.48 110.74,47.75 105.66,47.75 104.39,49.02 R29.P$1 106.93,51.56 110.74,55.37 112.78,55.37
  pour Top (isolate 0.305, no thermals): 101.85,52.83 106.3,52.83 106.3,47.75 101.85,47.75
  pour Bottom (isolate 0.305, no thermals): 101.85,52.83 106.3,52.83 106.3,47.75 101.85,47.75
VIN+8
  Top 0.254: U9.3 28.01,88.46 27.43,87.88 23.88,87.88 23.37,87.38 23.37,86.61 22.48,85.72 R36.1 22.1,85.6
  Top 1.524: JP41.1 21.34,76.71 20.07,77.98 14.99,77.98 13.72,79.25 R33.P$1 16.26,81.79 20.07,85.6 22.1,85.6
  pour Top (isolate 0.305, no thermals): 11.18,83.06 15.62,83.06 15.62,77.98 11.18,77.98
  pour Bottom (isolate 0.305, no thermals): 11.18,83.06 15.62,83.06 15.62,77.98 11.18,77.98
VIN+9
  Top 0.254: U10.3 58.23,88.46 57.66,87.88 54.1,87.88 53.59,87.38 53.59,86.61 52.7,85.72 R40.1 52.32,85.6
  Top 1.524: JP46.1 51.56,76.71 50.29,77.98 45.21,77.98 43.94,79.25 R37.P$1 46.48,81.79 50.29,85.6 52.32,85.6
  pour Top (isolate 0.305, no thermals): 41.4,83.06 45.85,83.06 45.85,77.98 41.4,77.98
  pour Bottom (isolate 0.305, no thermals): 41.4,83.06 45.85,83.06 45.85,77.98 41.4,77.98
VIN+10
  Top 0.254: U11.3 88.46,88.46 87.88,87.88 84.33,87.88 83.82,87.38 83.82,86.61 82.93,85.72 R44.1 82.55,85.6
  Top 1.524: JP51.1 81.79,76.71 80.52,77.98 75.44,77.98 74.17,79.25 R41.P$1 76.71,81.79 80.52,85.6 82.55,85.6
  pour Top (isolate 0.305, no thermals): 71.63,83.06 76.07,83.06 76.07,77.98 71.63,77.98
  pour Bottom (isolate 0.305, no thermals): 71.63,83.06 76.07,83.06 76.07,77.98 71.63,77.98
VIN+11
  Top 0.254: U12.3 118.68,88.46 118.11,87.88 114.55,87.88 114.05,87.38 114.05,86.61 113.15,85.72 R48.1 112.78,85.6
  Top 1.524: JP56.1 112.01,76.71 110.74,77.98 105.66,77.98 104.39,79.25 R45.P$1 106.93,81.79 110.74,85.6 112.78,85.6
  pour Top (isolate 0.305, no thermals): 101.85,83.06 106.3,83.06 106.3,77.98 101.85,77.98
  pour Bottom (isolate 0.305, no thermals): 101.85,83.06 106.3,83.06 106.3,77.98 101.85,77.98
VIN+12
  Top 0.254: U13.3 28.01,118.68 27.43,118.11 23.88,118.11 23.37,117.6 23.37,116.84 22.48,115.95 R52.1 22.1,115.82
  Top 1.524: JP61.1 21.34,106.93 20.07,108.2 14.99,108.2 13.72,109.47 R49.P$1 16.26,112.01 20.07,115.82 22.1,115.82
  pour Top (isolate 0.305, no thermals): 11.18,113.28 15.62,113.28 15.62,108.2 11.18,108.2
  pour Bottom (isolate 0.305, no thermals): 11.18,113.28 15.62,113.28 15.62,108.2 11.18,108.2
VIN+13
  Top 0.254: U14.3 58.23,118.68 57.66,118.11 54.1,118.11 53.59,117.6 53.59,116.84 52.7,115.95 R56.1 52.32,115.82
  Top 1.524: JP66.1 51.56,106.93 50.29,108.2 45.21,108.2 43.94,109.47 R53.P$1 46.48,112.01 50.29,115.82 52.32,115.82
  pour Top (isolate 0.305, no thermals): 41.4,113.28 45.85,113.28 45.85,108.2 41.4,108.2
  pour Bottom (isolate 0.305, no thermals): 41.4,113.28 45.85,113.28 45.85,108.2 41.4,108.2
VIN+14
  Top 0.254: U15.3 88.46,118.68 87.88,118.11 84.33,118.11 83.82,117.6 83.82,116.84 82.93,115.95 R60.1 82.55,115.82
  Top 1.524: JP71.1 81.79,106.93 80.52,108.2 75.44,108.2 74.17,109.47 R57.P$1 76.71,112.01 80.52,115.82 82.55,115.82
  pour Top (isolate 0.305, no thermals): 71.63,113.28 76.07,113.28 76.07,108.2 71.63,108.2
  pour Bottom (isolate 0.305, no thermals): 71.63,113.28 76.07,113.28 76.07,108.2 71.63,108.2
VIN+15
  Top 0.254: U16.3 118.68,118.68 118.11,118.11 114.55,118.11 114.05,117.6 114.05,116.84 113.15,115.95 R64.1 112.78,115.82
  Top 1.524: JP76.1 112.01,106.93 110.74,108.2 105.66,108.2 104.39,109.47 R61.P$1 106.93,112.01 110.74,115.82 112.78,115.82
  pour Top (isolate 0.305, no thermals): 101.85,113.28 106.3,113.28 106.3,108.2 101.85,108.2
  pour Bottom (isolate 0.305, no thermals): 101.85,113.28 106.3,113.28 106.3,108.2 101.85,108.2
VIN-
  Top 0.254: R1.2 25.28,25.27 24.38,26.16 24.38,26.67 24.64,26.92 32.51,26.92 32.77,27.18 32.77,27.69 32.45,28.01 U1.4
  Top 1.524: JP2.1 23.88,16.26 25.15,17.53 32.77,17.53 34.04,18.8 R3.P$2 31.5,21.34 27.69,25.15 R1.2
  pour Top (isolate 0.305, no thermals): 36.58,22.61 32.13,22.61 32.13,17.53 36.58,17.53
  pour Bottom (isolate 0.305, no thermals): 36.58,22.61 32.13,22.61 32.13,17.53 36.58,17.53
VIN-1
  Top 0.254: R8.2 55.5,25.27 54.61,26.16 54.61,26.67 54.86,26.92 62.74,26.92 62.99,27.18 62.99,27.69 62.67,28.01 U2.4
  Top 1.524: JP4.1 54.1,16.26 55.37,17.53 62.99,17.53 64.26,18.8 R5.P$2 61.72,21.34 57.91,25.15 R8.2
  pour Top (isolate 0.305, no thermals): 66.8,22.61 62.36,22.61 62.36,17.53 66.8,17.53
  pour Bottom (isolate 0.305, no thermals): 66.8,22.61 62.36,22.61 62.36,17.53 66.8,17.53
VIN-2
  Top 0.254: R12.2 85.73,25.27 84.84,26.16 84.84,26.67 85.09,26.92 92.96,26.92 93.22,27.18 93.22,27.69 92.9,28.01 U3.4
  Top 1.524: JP12.1 84.33,16.26 85.6,17.53 93.22,17.53 94.49,18.8 R9.P$2 91.95,21.34 88.14,25.15 R12.2
  pour Top (isolate 0.305, no thermals): 97.03,22.61 92.58,22.61 92.58,17.53 97.03,17.53
  pour Bottom (isolate 0.305, no thermals): 97.03,22.61 92.58,22.61 92.58,17.53 97.03,17.53
VIN-3
  Top 0.254: R16.2 115.95,25.27 115.06,26.16 115.06,26.67 115.32,26.92 123.19,26.92 123.44,27.18 123.44,27.69 123.12,28.01 U4.4
  Top 1.524: JP17.1 114.55,16.26 115.82,17.53 123.44,17.53 124.71,18.8 R13.P$2 122.17,21.34 118.36,25.15 R16.2
  pour Top (isolate 0.305, no thermals): 127.25,22.61 122.81,22.61 122.81,17.53 127.25,17.53
  pour Bottom (isolate 0.305, no thermals): 127.25,22.61 122.81,22.61 122.81,17.53 127.25,17.53
VIN-4
  Top 0.254: R20.2 25.28,55.5 24.38,56.39 24.38,56.9 24.64,57.15 32.51,57.15 32.77,57.4 32.77,57.91 32.45,58.23 U5.4
  Top 1.524: JP22.1 23.88,46.48 25.15,47.75 32.77,47.75 34.04,49.02 R17.P$2 31.5,51.56 27.69,55.37 R20.2
  pour Top (isolate 0.305, no thermals): 36.58,52.83 32.13,52.83 32.13,47.75 36.58,47.75
  pour Bottom (isolate 0.305, no thermals): 36.58,52.83 32.13,52.83 32.13,47.75 36.58,47.75
VIN-5
  Top 0.254: R24.2 55.5,55.5 54.61,56.39 54.61,56.9 54.86,57.15 62.74,57.15 62.99,57.4 62.99,57.91 62.67,58.23 U6.4
  Top 1.524: JP27.1 54.1,46.48 55.37,47.75 62.99,47.75 64.26,49.02 R21.P$2 61.72,51.56 57.91,55.37 R24.2
  pour Top (isolate 0.305, no thermals): 66.8,52.83 62.36,52.83 62.36,47.75 66.8,47.75
  pour Bottom (isolate 0.305, no thermals): 66.8,52.83 62.36,52.83 62.36,47.75 66.8,47.75
VIN-6
  Top 0.254: R28.2 85.73,55.5 84.84,56.39 84.84,56.9 85.09,57.15 92.96,57.15 93.22,57.4 93.22,57.91 92.9,58.23 U7.4
  Top 1.524: JP32.1 84.33,46.48 85.6,47.75 93.22,47.75 94.49,49.02 R25.P$2 91.95,51.56 88.14,55.37 R28.2
  pour Top (isolate 0.305, no thermals): 97.03,52.83 92.58,52.83 92.58,47.75 97.03,47.75
  pour Bottom (isolate 0.305, no thermals): 97.03,52.83 92.58,52.83 92.58,47.75 97.03,47.75
VIN-7
  Top 0.254: R32.2 115.95,55.5 115.06,56.39 115.06,56.9 115.32,57.15 123.19,57.15 123.44,57.4 123.44,57.91 123.12,58.23 U8.4
  Top 1.524: JP37.1 114.55,46.48 115.82,47.75 123.44,47.75 124.71,49.02 R29.P$2 122.17,51.56 118.36,55.37 R32.2
  pour Top (isolate 0.305, no thermals): 127.25,52.83 122.81,52.83 122.81,47.75 127.25,47.75
  pour Bottom (isolate 0.305, no thermals): 127.25,52.83 122.81,52.83 122.81,47.75 127.25,47.75
VIN-8
  Top 0.254: R36.2 25.28,85.72 24.38,86.61 24.38,87.12 24.64,87.38 32.51,87.38 32.77,87.63 32.77,88.14 32.45,88.46 U9.4
  Top 1.524: JP42.1 23.88,76.71 25.15,77.98 32.77,77.98 34.04,79.25 R33.P$2 31.5,81.79 27.69,85.6 R36.2
  pour Top (isolate 0.305, no thermals): 36.58,83.06 32.13,83.06 32.13,77.98 36.58,77.98
  pour Bottom (isolate 0.305, no thermals): 36.58,83.06 32.13,83.06 32.13,77.98 36.58,77.98
VIN-9
  Top 0.254: R40.2 55.5,85.72 54.61,86.61 54.61,87.12 54.86,87.38 62.74,87.38 62.99,87.63 62.99,88.14 62.67,88.46 U10.4
  Top 1.524: JP47.1 54.1,76.71 55.37,77.98 62.99,77.98 64.26,79.25 R37.P$2 61.72,81.79 57.91,85.6 R40.2
  pour Top (isolate 0.305, no thermals): 66.8,83.06 62.36,83.06 62.36,77.98 66.8,77.98
  pour Bottom (isolate 0.305, no thermals): 66.8,83.06 62.36,83.06 62.36,77.98 66.8,77.98
VIN-10
  Top 0.254: R44.2 85.73,85.72 84.84,86.61 84.84,87.12 85.09,87.38 92.96,87.38 93.22,87.63 93.22,88.14 92.9,88.46 U11.4
  Top 1.524: JP52.1 84.33,76.71 85.6,77.98 93.22,77.98 94.49,79.25 R41.P$2 91.95,81.79 88.14,85.6 R44.2
  pour Top (isolate 0.305, no thermals): 97.03,83.06 92.58,83.06 92.58,77.98 97.03,77.98
  pour Bottom (isolate 0.305, no thermals): 97.03,83.06 92.58,83.06 92.58,77.98 97.03,77.98
VIN-11
  Top 0.254: R48.2 115.95,85.72 115.06,86.61 115.06,87.12 115.32,87.38 123.19,87.38 123.44,87.63 123.44,88.14 123.12,88.46 U12.4
  Top 1.524: JP57.1 114.55,76.71 115.82,77.98 123.44,77.98 124.71,79.25 R45.P$2 122.17,81.79 118.36,85.6 R48.2
  pour Top (isolate 0.305, no thermals): 127.25,83.06 122.81,83.06 122.81,77.98 127.25,77.98
  pour Bottom (isolate 0.305, no thermals): 127.25,83.06 122.81,83.06 122.81,77.98 127.25,77.98
VIN-12
  Top 0.254: R52.2 25.28,115.95 24.38,116.84 24.38,117.35 24.64,117.6 32.51,117.6 32.77,117.86 32.77,118.36 32.45,118.68 U13.4
  Top 1.524: JP62.1 23.88,106.93 25.15,108.2 32.77,108.2 34.04,109.47 R49.P$2 31.5,112.01 27.69,115.82 R52.2
  pour Top (isolate 0.305, no thermals): 36.58,113.28 32.13,113.28 32.13,108.2 36.58,108.2
  pour Bottom (isolate 0.305, no thermals): 36.58,113.28 32.13,113.28 32.13,108.2 36.58,108.2
VIN-13
  Top 0.254: R56.2 55.5,115.95 54.61,116.84 54.61,117.35 54.86,117.6 62.74,117.6 62.99,117.86 62.99,118.36 62.67,118.68 U14.4
  Top 1.524: JP67.1 54.1,106.93 55.37,108.2 62.99,108.2 64.26,109.47 R53.P$2 61.72,112.01 57.91,115.82 R56.2
  pour Top (isolate 0.305, no thermals): 66.8,113.28 62.36,113.28 62.36,108.2 66.8,108.2
  pour Bottom (isolate 0.305, no thermals): 66.8,113.28 62.36,113.28 62.36,108.2 66.8,108.2
VIN-14
  Top 0.254: R60.2 85.73,115.95 84.84,116.84 84.84,117.35 85.09,117.6 92.96,117.6 93.22,117.86 93.22,118.36 92.9,118.68 U15.4
  Top 1.524: JP72.1 84.33,106.93 85.6,108.2 93.22,108.2 94.49,109.47 R57.P$2 91.95,112.01 88.14,115.82 R60.2
  pour Top (isolate 0.305, no thermals): 97.03,113.28 92.58,113.28 92.58,108.2 97.03,108.2
  pour Bottom (isolate 0.305, no thermals): 97.03,113.28 92.58,113.28 92.58,108.2 97.03,108.2
VIN-15
  Top 0.254: R64.2 115.95,115.95 115.06,116.84 115.06,117.35 115.32,117.6 123.19,117.6 123.44,117.86 123.44,118.36 123.12,118.68 U16.4
  Top 1.524: JP77.1 114.55,106.93 115.82,108.2 123.44,108.2 124.71,109.47 R61.P$2 122.17,112.01 118.36,115.82 R64.2
  pour Top (isolate 0.305, no thermals): 127.25,113.28 122.81,113.28 122.81,108.2 127.25,108.2
  pour Bottom (isolate 0.305, no thermals): 127.25,113.28 122.81,113.28 122.81,108.2 127.25,108.2
VOUT
  Top 0.254: U1.1 25.65,29.91 | 25.65,29.91 24.83,29.91 R4.P$2 | R2.2 25.15,31.5 25.65,30.99 25.65,29.91
  Bottom 0.254: JP7.1 26.42,26.42 R4.P$2
VOUT1
  Top 0.254: U2.1 55.88,29.91 | 55.88,29.91 55.05,29.91 R6.P$2 | R7.2 55.37,31.5 55.88,30.99 55.88,29.91
  Bottom 0.254: JP10.1 56.64,26.42 R6.P$2
VOUT2
  Top 0.254: U3.1 86.11,29.91 | 86.11,29.91 85.28,29.91 R10.P$2 | R11.2 85.6,31.5 86.11,30.99 86.11,29.91
  Bottom 0.254: JP15.1 86.87,26.42 R10.P$2
VOUT3
  Top 0.254: U4.1 116.33,29.91 | 116.33,29.91 115.5,29.91 R14.P$2 | R15.2 115.82,31.5 116.33,30.99 116.33,29.91
  Bottom 0.254: JP20.1 117.09,26.42 R14.P$2
VOUT4
  Top 0.254: U5.1 25.65,60.13 | 25.65,60.13 24.83,60.13 R18.P$2 | R19.2 25.15,61.72 25.65,61.21 25.65,60.13
  Bottom 0.254: JP25.1 26.42,56.64 R18.P$2
VOUT5
  Top 0.254: U6.1 55.88,60.13 | 55.88,60.13 55.05,60.13 R22.P$2 | R23.2 55.37,61.72 55.88,61.21 55.88,60.13
  Bottom 0.254: JP30.1 56.64,56.64 R22.P$2
VOUT6
  Top 0.254: U7.1 86.11,60.13 | 86.11,60.13 85.28,60.13 R26.P$2 | R27.2 85.6,61.72 86.11,61.21 86.11,60.13
  Bottom 0.254: JP35.1 86.87,56.64 R26.P$2
VOUT7
  Top 0.254: U8.1 116.33,60.13 | 116.33,60.13 115.5,60.13 R30.P$2 | R31.2 115.82,61.72 116.33,61.21 116.33,60.13
  Bottom 0.254: JP40.1 117.09,56.64 R30.P$2
VOUT8
  Top 0.254: U9.1 25.65,90.36 | 25.65,90.36 24.83,90.36 R34.P$2 | R35.2 25.15,91.95 25.65,91.44 25.65,90.36
  Bottom 0.254: JP45.1 26.42,86.87 R34.P$2
VOUT9
  Top 0.254: U10.1 55.88,90.36 | 55.88,90.36 55.05,90.36 R38.P$2 | R39.2 55.37,91.95 55.88,91.44 55.88,90.36
  Bottom 0.254: JP50.1 56.64,86.87 R38.P$2
VOUT10
  Top 0.254: U11.1 86.11,90.36 | 86.11,90.36 85.28,90.36 R42.P$2 | R43.2 85.6,91.95 86.11,91.44 86.11,90.36
  Bottom 0.254: JP55.1 86.87,86.87 R42.P$2
VOUT11
  Top 0.254: U12.1 116.33,90.36 | 116.33,90.36 115.5,90.36 R46.P$2 | R47.2 115.82,91.95 116.33,91.44 116.33,90.36
  Bottom 0.254: JP60.1 117.09,86.87 R46.P$2
VOUT12
  Top 0.254: U13.1 25.65,120.58 | 25.65,120.58 24.83,120.58 R50.P$2 | R51.2 25.15,122.17 25.65,121.67 25.65,120.58
  Bottom 0.254: JP65.1 26.42,117.09 R50.P$2
VOUT13
  Top 0.254: U14.1 55.88,120.58 | 55.88,120.58 55.05,120.58 R54.P$2 | R55.2 55.37,122.17 55.88,121.67 55.88,120.58
  Bottom 0.254: JP70.1 56.64,117.09 R54.P$2
VOUT14
  Top 0.254: U15.1 86.11,120.58 | 86.11,120.58 85.28,120.58 R58.P$2 | R59.2 85.6,122.17 86.11,121.67 86.11,120.58
  Bottom 0.254: JP75.1 86.87,117.09 R58.P$2
VOUT15
  Top 0.254: U16.1 116.33,120.58 | 116.33,120.58 115.5,120.58 R62.P$2 | R63.2 115.82,122.17 116.33,121.67 116.33,120.58
  Bottom 0.254: JP80.1 117.09,117.09 R62.P$2

## Text on the board
Bottom: v10 | v10 | v10 | v10 | v10 | v10 | v10 | v10 | v10 | v10 | v10 | v10 | v10 | v10 | v10 | v10
Dimension: Route Out | Route Out | Route Out | Route Out | Route Out | Route Out | Route Out | Route Out | Route Out | Route Out | Route Out | Route Out | Route Out | Route Out | Route Out | Route Out | Route Out | Route Out | Route Out | Route Out | Route Out | Route Out | Route Out | Route Out | Route Out
tPlace: INA169 | INA169 | INA169 | INA169 | Current Sense | Current Sense | Current Sense | Current Sense | Breakout | Breakout | Breakout | Breakout | RL | RL | RL | RL | VIN+ | VIN- | VIN+ | VIN- | VIN+ | VIN- | VIN+ | VIN- | RS | RS | RS | RS | GND | VIN+ | VIN- | VOUT | VCC | GND | VIN+ | VIN- | VOUT | VCC | GND | VIN+ | VIN- | VOUT | VCC | GND | VIN+ | VIN- | VOUT | VCC | INA169 | INA169 | INA169 | INA169 | Current Sense | Current Sense | Current Sense | Current Sense | Breakout | Breakout | Breakout | Breakout | RL | RL | RL | RL | VIN+ | VIN- | VIN+ | VIN- | VIN+ | VIN- | VIN+ | VIN- | RS | RS | RS | RS | GND | VIN+ | VIN- | VOUT | VCC | GND | VIN+ | VIN- | VOUT | VCC | GND | VIN+ | VIN- | VOUT | VCC | GND | VIN+ | VIN- | VOUT | VCC | INA169 | INA169 | INA169 | INA169 | Current Sense | Current Sense | Current Sense | Current Sense | Breakout | Breakout | Breakout | Breakout | RL | RL | RL | RL | VIN+ | VIN- | VIN+ | VIN- | VIN+ | VIN- | VIN+ | VIN- | RS | RS | RS | RS | GND | VIN+ | VIN- | VOUT | VCC | GND | VIN+ | VIN- | VOUT | VCC | GND | VIN+ | VIN- | VOUT | VCC | GND | VIN+ | VIN- | VOUT | VCC | INA169 | INA169 | INA169 | INA169 | Current Sense | Current Sense | Current Sense | Current Sense | Breakout | Breakout | Breakout | Breakout | RL | RL | RL | RL | VIN+ | VIN- | VIN+ | VIN- | VIN+ | VIN- | VIN+ | VIN- | RS | RS | RS | RS | GND | VIN+ | VIN- | VOUT | VCC | GND | VIN+ | VIN- | VOUT | VCC | GND | VIN+ | VIN- | VOUT | VCC | GND | VIN+ | VIN- | VOUT | VCC
bPlace: current range | to change | Replace RS | 3.5mA-35mA | current range | to change | Replace RS | 3.5mA-35mA | current range | to change | Replace RS | 3.5mA-35mA | current range | to change | Replace RS | 3.5mA-35mA | GND | VIN+ | VIN- | VOUT | VCC | GND | VIN+ | VIN- | VOUT | VCC | GND | VIN+ | VIN- | VOUT | VCC | GND | VIN+ | VIN- | VOUT | VCC | current range | to change | Replace RS | 3.5mA-35mA | current range | to change | Replace RS | 3.5mA-35mA | current range | to change | Replace RS | 3.5mA-35mA | current range | to change | Replace RS | 3.5mA-35mA | GND | VIN+ | VIN- | VOUT | VCC | GND | VIN+ | VIN- | VOUT | VCC | GND | VIN+ | VIN- | VOUT | VCC | GND | VIN+ | VIN- | VOUT | VCC | current range | to change | Replace RS | 3.5mA-35mA | current range | to change | Replace RS | 3.5mA-35mA | current range | to change | Replace RS | 3.5mA-35mA | current range | to change | Replace RS | 3.5mA-35mA | GND | VIN+ | VIN- | VOUT | VCC | GND | VIN+ | VIN- | VOUT | VCC | GND | VIN+ | VIN- | VOUT | VCC | GND | VIN+ | VIN- | VOUT | VCC | current range | to change | Replace RS | 3.5mA-35mA | current range | to change | Replace RS | 3.5mA-35mA | current range | to change | Replace RS | 3.5mA-35mA | current range | to change | Replace RS | 3.5mA-35mA | GND | VIN+ | VIN- | VOUT | VCC | GND | VIN+ | VIN- | VOUT | VCC | GND | VIN+ | VIN- | VOUT | VCC | GND | VIN+ | VIN- | VOUT | VCC